# Altium PCB f401ccu6_w25q64_20210612.PcbDoc
Units mil, origin at the board's own origin, x right, y up, seen from the top; angles counter-clockwise.
Board outline 1812.39 x 625.7 mil, 2 copper layers (Top Layer, Bottom Layer); 36 components, 43 nets, 155 pads, 77 vias.
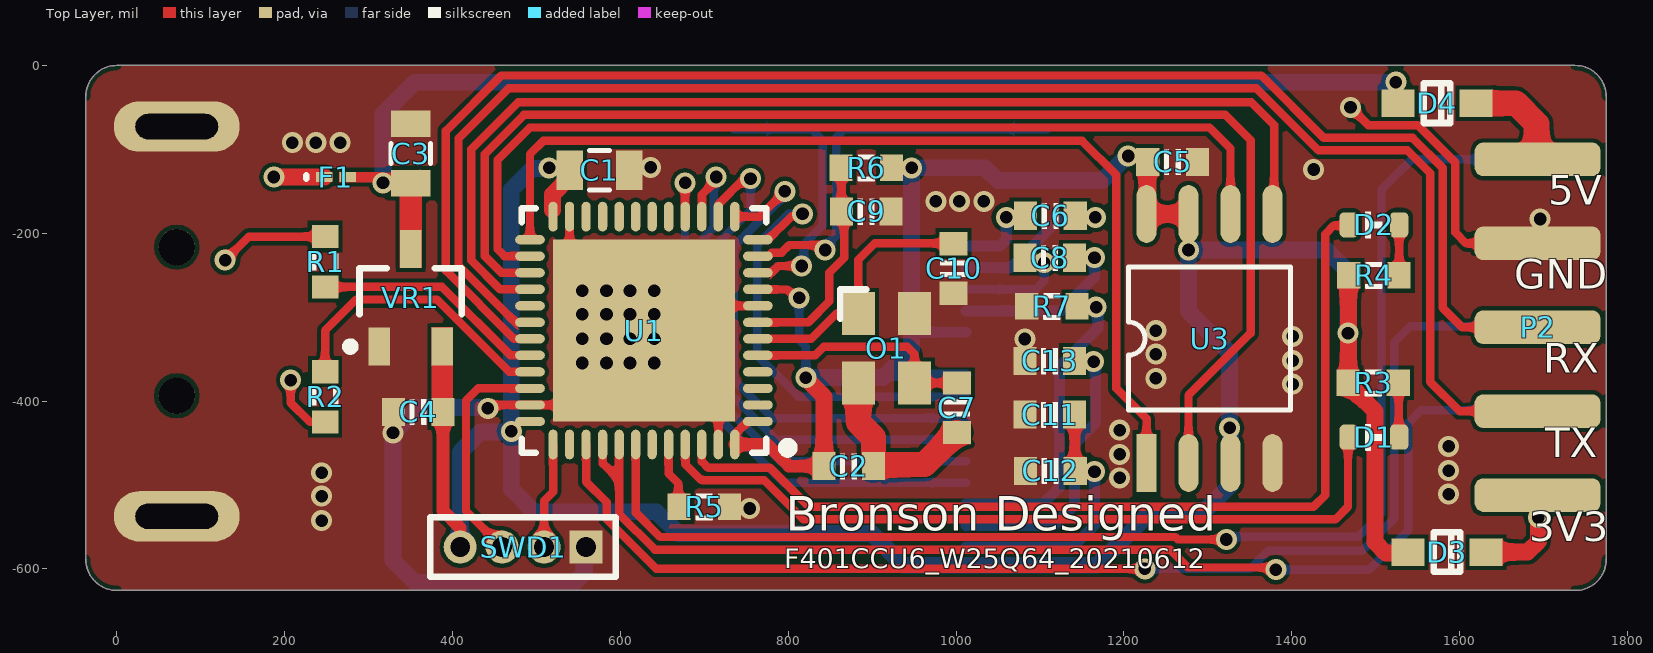
[diagram p0: Top Layer view]
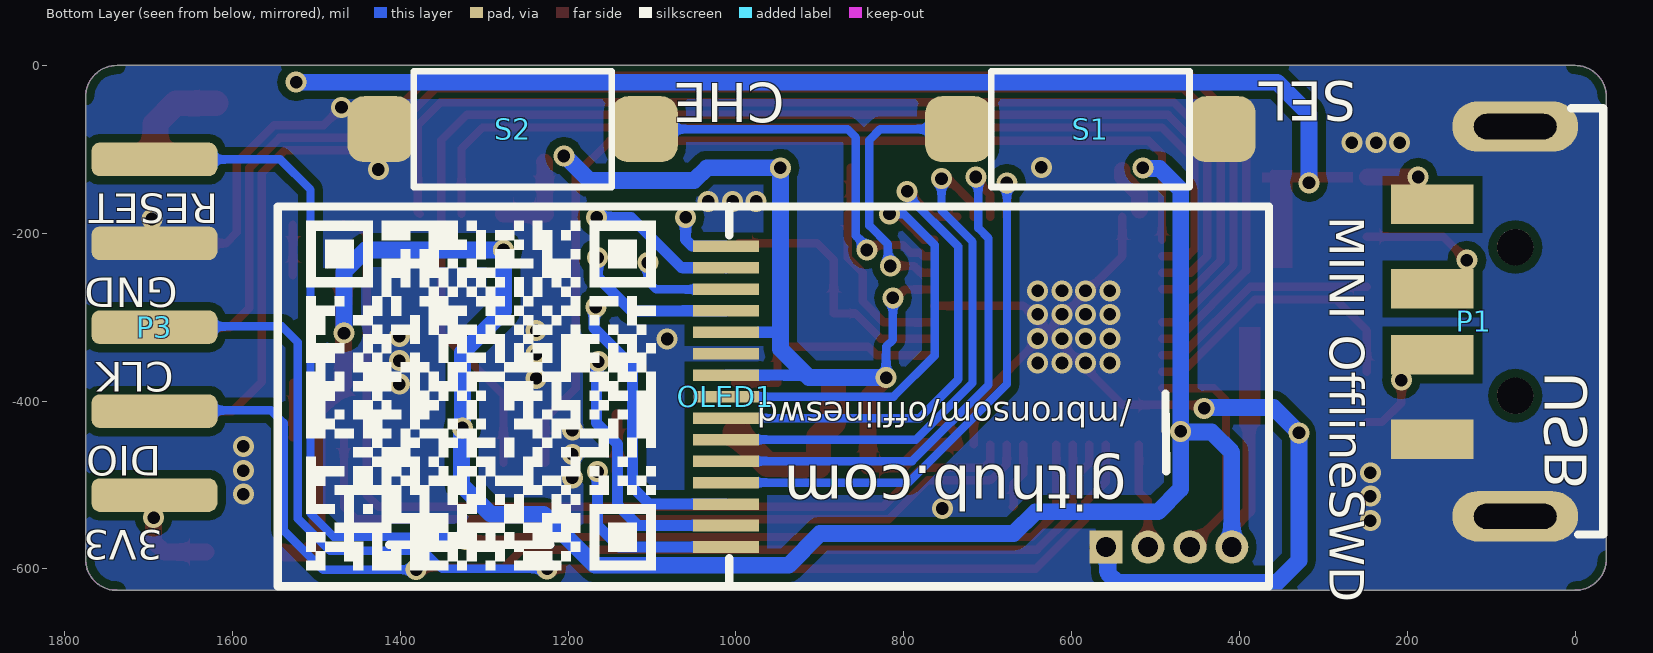
[diagram p1: Bottom Layer view, seen from below]
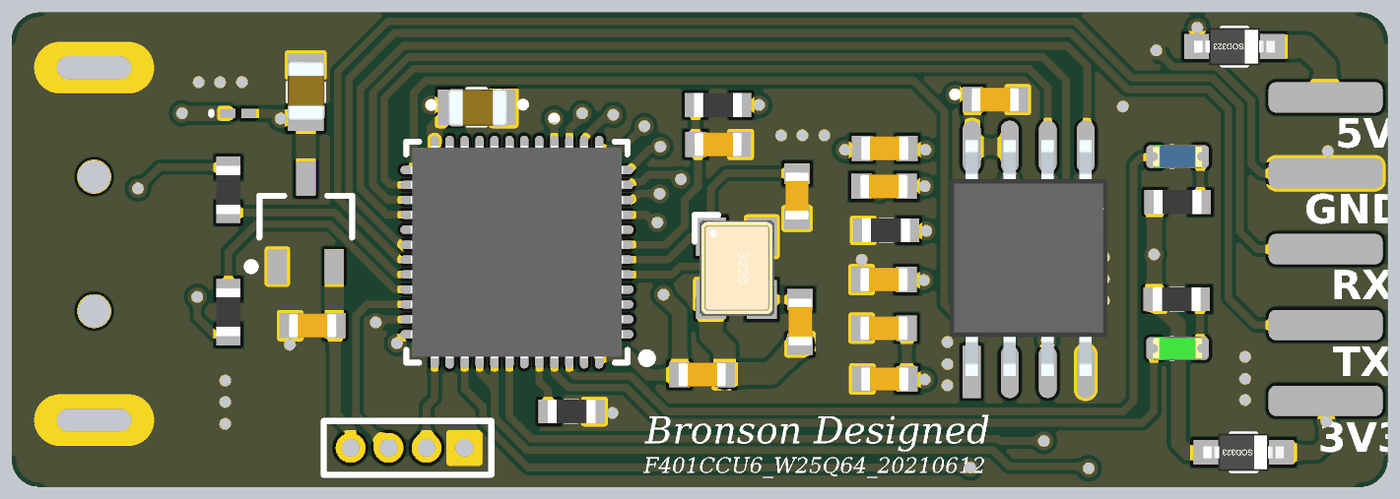
[diagram p2: 3D render of the assembled board from above, using the file's embedded part models]
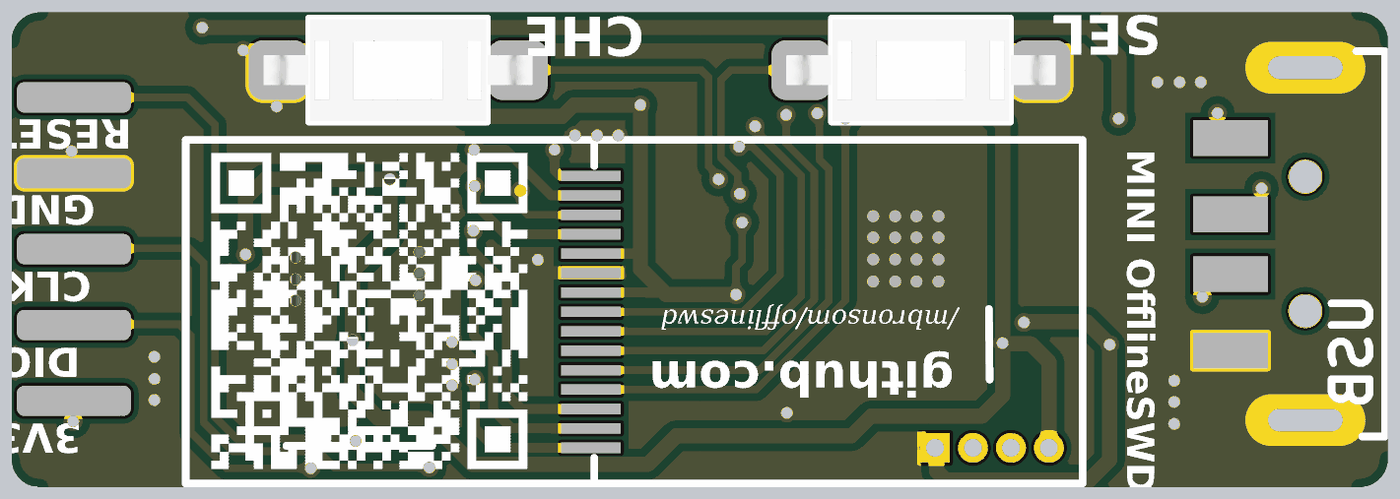
[diagram p3: 3D render of the assembled board from below, using the file's embedded part models]

## Layer stack, top to bottom
Top Solder: solder mask 0.4, Solder Resist, Dk 3.5
Top Layer: signal copper 1.4
Dielectric 1: dielectric 12.6, FR-4, Dk 4.8
Bottom Layer: signal copper 1.4
Bottom Solder: solder mask 0.4, Solder Resist, Dk 3.5

## Board outline
-37.39,-588.7 -37.39,-37.39 -37.39,-36.99 cw(c0,-37.39) 0.34,0 0,0 1737.39,0 1737.39,-0.04 cw(c1737.75,-37.29) 1775,-36.87 1775,-37.29 1775,-588.71 1774.92,-588.71 cw(c1737.86,-588.64) 1737.19,-625.7 0.32,-625.7 cw(c0.01,-588.3)

## Design rules (kind name [scope] priority, off if disabled: settings)
Clearance Clearance_1 [InNamedPolygon('Bottom Layer-GND')] p1: gap=10 ignorepadtopadclearanceinfootprint=FALSE except(0: Arc-Hole Track-Hole SMDPad-Hole THPad-Hole Via-Hole Fill-Hole Poly-Hole Region-Hole Text-Hole)
Clearance [All] p2: gap=5 ignorepadtopadclearanceinfootprint=FALSE
ComponentClearance [All] p1 off: gap=10 collisioncheckmode=3 verticalgap=100000 showdistances=FALSE
MinimumSolderMaskSliver [All] p1 off: minsoldermaskwidth=5
PlaneConnect [All] p1: planeconnectstyle=Direct reliefexpansion=20 reliefentries=4 reliefconductorwidth=10 reliefairgap=10
PolygonConnect [All] p1: connectstyle=Direct reliefconductorwidth=10 reliefentries=4 polygonreliefangle="90 Angle" airgapwidth=10
RoutingVias [All] p1: holewidth=28 width=50 viastyle="Through Hole" minholewidth=28 minwidth=50 maxholewidth=28 maxwidth=50
SilkToSilkClearance [All] p1 off: silktosilkclearance=10
SilkToSolderMaskClearance [IsPad] p1 off: minsilkscreentomaskgap=10 clearancetoexposedcopper=TRUE
SolderMaskExpansion [All] p1: expansion=4
Width [All] p1: maxlimit=30 minlimit=5 preferedwidth=10
25 further rules are at their usual default settings.

## Components (designator, comment, footprint, x,y, rotation, side; value= is the part's Value field where it differs from the comment)
C1 "100nF (104) 10% 50V" 0805L 575,-125 r180 top
C2 "100nF (104) 10% 50V" C0603 872,-479.51 r180 top
C3 "1uF (105) 10% 50V" 0805L 350,-105 r270 top
C4 "1uF (105) 10% 50V" C0603 359,-410.88 r0 top
C5 "100nF (104) 10% 50V" C0603 1258,-113 r0 top
C6 "1uF (105) 10% 50V" C0603 1112.46,-181.21 r180 top
C7 "9pF" C0603 1003,-408 r270 top
C8 "1uF (105) 10% 50V" C0603 1111.46,-231.21 r180 top
C9 "100nF (104) 10% 50V" C0603 893,-176 r180 top
C10 "9pF" C0603 999,-242 r270 top
C11 "4.7uF (475) 10% 16V" C0603 1111.46,-414.21 r0 top
C12 "100nF (104) 10% 50V" C0603 1112.46,-481.21 r0 top
C13 "2.2uF (225) 10% 16V" C0603 1111.46,-350.21 r0 top
D1 "绿灯 0603" LED_0603_GREEN 1498,-443 r0 top
D2 "蓝灯 0603" LED_0603_BLUE 1498,-190 r0 top
D3 "1N4148WS T4" SOD-323 1585,-580 r180 top
D4 "1N4148WS T4" SOD-323 1573,-45 r180 top
F1 "500mA" 0603 261,-133 r0 top
O1 "16MHZ" "OSC 3225-4P" 917,-337 r270 top
OLED1 "QG-2832TLBFG02" 0.91-OLED 365.43,-671.74 r0 bottom
P1 "USB" USB_A/P_B 71.27,-305.64 r90 bottom
P2 "Header 5" PinHeader_5 1695,-308 r180 top
P3 "Header 5" PinHeader_5 1695,-316 r180 bottom
R1 "22Ω (22R0) ±1%" RES0603 248,-234 r90 top
R2 "22Ω (22R0) ±1%" RES0603 248,-395 r270 top
R3 "1KΩ (1001) ±1%" RES0603 1497,-378 r180 top
R4 "1KΩ (1001) ±1%" RES0603 1498,-250 r180 top
R5 "10KΩ (1002) ±1%" RES0603 700,-526 r180 top
R6 "10KΩ (1002) ±1%" RES0603 893,-122 r0 top
R7 "2MΩ (2004) ±1%" RES0603 1114.15,-287.21 r0 top
S1 "KEY" KEY 577.52,-76 r0 bottom
S2 "KEY" KEY 1266,-76 r180 bottom
SWD1 "MHDR1X4" MHDR1X4 559,-574 r180 top
U1 "STM32F401CCU6" UFQFPN-48_L7.0-W7.0-P0.50-BL-EP 628,-316 r90 top
U3 "W25Q64" SOP8_W 1227,-473.83 r90 top
VR1 "XC6206P332MR" SOT-23-3L 350,-277 r270 top

## Footprints (in the part's own frame and the unit in brackets; to place one, negate y for a bottom-side part, rotate by r counter-clockwise, add the part's x,y. Pads: shape width x height; smd on the part's side, far side on the other; paste and mask are expansions set on the pad)
0.91-OLED [mm]
  rect 2x0.35 smd: 1(16.423,-11.585) 2(16.423,-10.933) 3(16.423,-10.283) 4(16.423,-9.633) 5(16.423,-8.985) 6(16.423,-8.335) 7(16.423,-7.685) 8(16.423,-7.035) 9(16.423,-6.385) 10(16.423,-5.735) 11(16.423,-5.085) 12(16.423,-4.435) 13(16.423,-3.785) 14(16.423,-3.135) 15(16.423,-2.485)
  silkscreen extent -0.02,-12.79 29.98,-1.29
0603 [mm] "Chip Inductor, Body 0.6x0.3mm, IPC High Density"
  rect 0.5x0.3 smd: 1(-0.35,0) 2(0.35,0)
  silkscreen extent -0.9,-0.05 -0.9,0.05, body extent -0.33,-0.18 0.33,0.18, height 0.55
0805L [mm]
  rect 0.8x1.2 smd: 1(-0.9,0) 2(0.9,0)
  silkscreen extent -0.3,-0.6 0.3,0.6, body extent -1.04,-0.61 0.97,0.64, height 1.4
C0603 [mm]
  rect 0.7x0.85 smd: 1(-0.75,-0.051) 2(0.75,-0.051)
  silkscreen extent -0.24,-0.43 0.24,0.33, body extent -0.8,-0.45 0.8,0.35, height 0.8
KEY [mm]
  rrect50% 2x2 smd: 1(-4,0) 2(4,0)
  silkscreen extent -3,-1.75 3,1.75, body extent -4.5,-1.75 4.5,1.75, height 4.5
LED_0603_BLUE [mil]
  rrect50% 22x30 smd: 1(-30,0) 2(30,0)
  silkscreen extent -10,-16 10,16, body extent -32,-16 32,16, height 24
LED_0603_GREEN [mil]
  rrect50% 22x30 smd: 1(-30,0) 2(30,0)
  silkscreen extent -10,-16 10,16, body extent -32,-16 32,16, height 24
MHDR1X4 [mm] "Connector; Header; 4 Position"
  rect 1x1 hole 0.6: 1(0,0)
  round 1 hole 0.6: 2(1.27,0) 3(2.54,0) 4(3.81,0)
  silkscreen extent -0.9,-0.9 4.71,0.9
"OSC 3225-4P" [mm]
  rect 1.3x1 smd: 1(-1.05,-0.85) 2(1.05,-0.85) 3(1.05,0.85) 4(-1.05,0.85)
  silkscreen extent -1.78,-1.4 -0.89,-0.61, body extent -1.6,-1.23 1.6,1.27, height 0.7
PinHeader_5 [mil]
  rrect50% 150x40 smd: 1(2,204) 2(2,104) 3(2,4) 4(2,-96) 5(2,-196)
RES0603 [mm]
  rect 0.7x0.8 smd: 1(-0.762,0) 2(0.762,0)
  silkscreen extent -0.24,-0.39 0.24,0.39, body extent -0.8,-0.4 0.8,0.4, height 0.45
SOD-323 [mm]
  rect 1x0.83 smd: 1(1.18,0) 2(-1.18,0)
  silkscreen extent -0.4,-0.6 0.4,0.6, body extent -1.35,-0.62 1.35,0.63, height 1.1
SOP8_W [mm]
  rect 1.75x0.6 smd: 1(0,0)
  oval 1.75x0.6 smd: 2(0,-1.27) 3(0,-2.54) 4(0,-3.81) 5(7.536,-3.81) 6(7.536,-2.54) 7(7.536,-1.27) 8(7.536,0)
  silkscreen extent 1.61,-4.36 5.93,0.55, body extent -0.14,-4.54 7.76,0.74, height 2.16
SOT-23-3L [mm]
  rect 1.15x0.65 smd: 1(1.475,-0.95) 2(1.475,0.95) 3(-1.475,0)
  silkscreen extent -0.9,-1.95 1.6,1.55, body extent -0.9,-1.55 0.9,1.55, height 1.25
UFQFPN-48_L7.0-W7.0-P0.50-BL-EP [mm]
  oval 0.28x0.9 smd: 1(-2.751,-3.449) 2(-2.25,-3.449) 3(-1.75,-3.449) 4(-1.25,-3.449) 5(-0.749,-3.449) 6(-0.249,-3.449) 7(0.249,-3.449) 8(0.749,-3.449) 9(1.25,-3.449) 10(1.75,-3.449) 11(2.251,-3.449) 12(2.751,-3.449) 25(2.751,3.449) 26(2.251,3.449) 27(1.75,3.449) 28(1.25,3.449) 29(0.749,3.449) 30(0.249,3.449) 31(-0.249,3.449) 32(-0.749,3.449) 33(-1.25,3.449) 34(-1.75,3.449) 35(-2.25,3.449) 36(-2.751,3.449)
  oval 0.9x0.28 smd: 13(3.449,-2.751) 14(3.449,-2.25) 15(3.449,-1.75) 16(3.449,-1.25) 17(3.449,-0.749) 18(3.449,-0.249) 19(3.449,0.249) 20(3.449,0.749) 21(3.449,1.25) 22(3.449,1.75) 23(3.449,2.25) 24(3.449,2.751) 37(-3.449,2.751) 38(-3.449,2.25) 39(-3.449,1.75) 40(-3.449,1.25) 41(-3.449,0.749) 42(-3.449,0.249) 43(-3.449,-0.249) 44(-3.449,-0.749) 45(-3.449,-1.25) 46(-3.449,-1.75) 47(-3.449,-2.25) 48(-3.449,-2.751)
  rect 5.5x5.5 smd: 49(0,0)
  silkscreen extent -3.7,-4.5 3.7,3.7, body extent -4.32,-3.55 3.55,4.06, height 0.7
USB_A/P_B [mm] "A型USB 插头，20*13*4.5mm"
  round 1.1 hole 1.1: 0(-2.237,0) 0(2.263,0)
  rect 1.2x2.5 smd: 1(3.556,2.508) 2(1,2.508) 3(-1,2.508) 4(-3.556,2.508)
  oval 1.524x3.81 hole 0.762 slot 2.5 at 90 deg: 4(-5.887,0) 4(5.913,0)
  silkscreen extent -6.44,-2.67 6.46,-1.7, body extent -6.46,-17.9 6.49,2.7, height 3.25

## Part data
C1 C2 C5 C9 C12: library part "0603 100nF (104) 10%", "贴片电容", Package=0603, SuppliersPartNumber=C14663, ComponentLink1Description=供应商链接, ComponentLink1URL=http://www.szlcsc.com/product/details_15331.html, Supplier=LC
C3 C4 C6 C8: library part "0603 1uF (105) 10%", "贴片电容", Package=0603, SuppliersPartNumber=C15849, ComponentLink1Description=供应商链接, ComponentLink1URL=http://www.szlcsc.com/product/details_16531.html, Supplier=LC
C7 C10: library part "0603 22pF (220) 5%", "贴片电容", Package=0603, SuppliersPartNumber=C1653, ComponentLink1Description=供应商链接, ComponentLink1URL=http://www.szlcsc.com/product/details_2005.html, Supplier=LC
C11: library part "0603 4.7uF (475) 10%", "贴片电容", Package=0603, SuppliersPartNumber=C19666, ComponentLink1Description=供应商链接, ComponentLink1URL=http://www.szlcsc.com/product/details_20375.html, Supplier=LC
C13: library part "0603 2.2uF (225) 10%", "贴片电容", Package=0603, SuppliersPartNumber=C23630, ComponentLink1Description=供应商链接, ComponentLink1URL=http://www.szlcsc.com/product/details_24366.html, Supplier=LC
D1: library part "0603 绿灯", "发光二极管", Package=0603, SuppliersPartNumber=C72043, ComponentLink1Description=供应商链接, ComponentLink1URL=http://www.szlcsc.com/product/details_73152.html, Supplier=LC
D2: library part "0603 蓝灯", "发光二极管", Package=0603, SuppliersPartNumber=C72041, ComponentLink1Description=供应商链接, ComponentLink1URL=http://www.szlcsc.com/product/details_73150.html, Supplier=LC
D3 D4: library part "SOD-323 1N4148WS T4", "二极管", Package=SOD-323, SuppliersPartNumber=C2128, ComponentLink1Description=供应商链接, ComponentLink1URL=http://www.szlcsc.com/product/details_2485.html, Supplier=LC
F1: library part FUSE, "保险丝，熔断丝"
O1: library part OSC, "OSC"
OLED1: library part 0.91-OLED, BOM_Manufacturer=Allvision, BOM_Manufacturer Part=QG-2832TLBFG02, BOM_Supplier=LCSC, BOM_Supplier Part=C91220, Contributor=LCSC, spicePre=O, spiceSymbolName=QG-2832TLBFG02
P1: library part 1470695-2, "USB 1.1, Right Angle, SMT, A Type, Plug, 4 Position, Natural", PackageDocument=21-Jan-2003, ComponentLink1Description="Manufacturer Link", ComponentLink1URL=http://www.tycoelectronics.com/, ComponentLink2Description="Packaging Specification", ComponentLink2URL=http://ecommas.tycoelectronics.com/commerce/DocumentDelivery/DDEController?Action=showdoc&DocId=Customer+Drawing%7F1470695%7FO%7Fpdf%7FEnglish%7FC_1470695_O.pdf, ContactMaterial=Brass, ContactPlating="Gold (30) over Nickel (50)", DatasheetDocument=21-Jan-2003, DrillSize="Corresponds to nominal value.", HousingMaterial=Thermoplastic, PackageReference=1470695A, PanelGround=Without, PCB_Layout="Complies with manufacturer's recommendation.", Published=15-Jul-2004, Publisher="Altium Limited"
P2 P3: "Header, 5-Pin", LatestRevisionDate=17-Jul-2002, LatestRevisionNote="Re-released for DXP Platform.", Publisher="Altium Limited"
R1 R2: library part "0603 22Ω (22", "贴片电阻", Package=0603, SuppliersPartNumber=C23345, ComponentLink1Description=供应商链接, ComponentLink1URL=http://www.szlcsc.com/product/details_24078.html, Supplier=LC
R3 R4: library part "0603 1KΩ (10", "贴片电阻", Package=0603, SuppliersPartNumber=C21190, ComponentLink1Description=供应商链接, ComponentLink1URL=http://www.szlcsc.com/product/details_21904.html, Supplier=LC
R5 R6: library part "0603 10KΩ (10", "贴片电阻", Package=0603, SuppliersPartNumber=C25804, ComponentLink1Description=供应商链接, ComponentLink1URL=http://www.szlcsc.com/product/details_26547.html, Supplier=LC
R7: library part "0603 2MΩ (20", "贴片电阻", Package=0603, SuppliersPartNumber=C22976, ComponentLink1Description=供应商链接, ComponentLink1URL=http://www.szlcsc.com/product/details_23703.html, Supplier=LC
SWD1: "Header, 4-Pin", LatestRevisionDate=17-Jul-2002, LatestRevisionNote="Re-released for DXP Platform.", Publisher="Altium Limited"
U3: library part W25Q, "W25Q"
VR1: library part "SOT-23 XC620", "低压差线性稳压(LDO)", Package=SOT-23, SuppliersPartNumber=C5446, ComponentLink1Description=供应商链接, ComponentLink1URL=http://www.szlcsc.com/product/details_5896.html, Supplier=LC

## Via types
v1: diameter 25, hole 15, Top Layer to Bottom Layer, tented both sides, 77 vias

## Nets (pads, with @x,y where several pads share a name; then routed paths per layer and width w, separated by ;. In a path a pad name is that pad's centre, name@x,y a point inside that pad or via, vN(x,y) a via of type N, cw(c..) or ccw(c..) an arc to the next point about the centre after c; other vN are vias at no path point)
3V3: C1.2 C2.2 C4.2 C5.1 D3.1 OLED1.5 OLED1.7 R3.2 R4.2 R6.2 SWD1.4 U1.1 U1.9 U1.24 U1.36 U1.48 U3.3 U3.7 U3.8 VR1.2 | length 4044.1
  Top Layer w10: U1.48 736.3,-439.59 751.6,-424.29 U1.1 ; U1.9 764,-266.99 798.93,-266.99 808.94,-277 v1(813,-277)
  Top Layer w15: C4.2 388.53,-530.53 409,-551 SWD1.4 ; U1.48 775.03,-451.79 800.75,-477.51 C2.2
  Top Layer w20: U1.24@518.89,-172.48 518.89,-153.56 539.57,-132.87 C1.2 ; v1(821,-372) 821,-373.35 842.47,-394.83 C2.2 ; C5.1 1227.69,-115.78 1227.69,-176.45 U3.8 U3.7 ; R4.2 1467.5,-250.5 1467.5,-377.5 R3.2 1467,-379.97 1499.06,-412.03 1499.06,-568.06 1512,-581 1537.54,-581 D3.1
  Bottom Layer w10: v1(813,-277) 813,-327 821,-335 v1(821,-372)
  Bottom Layer w13: 915.82,-369.18 OLED1.7 ; 947,-318 OLED1.5
  Bottom Layer w20: SWD1.4 409,-461 433.04,-436.96 469.04,-436.96 v1(470,-436) ; v1(515,-122) 514.04,-122.96 495.04,-122.96 470,-148 v1(470,-436) ; v1(821,-372) 913,-372 915.82,-369.18 947,-338 947,-318 v1(947,-122) 1034.68,-122 1049.68,-137 1174.65,-137 1203.65,-108 v1(1205,-108) ; v1(1467,-319) 1467,-245.37 1441.63,-220 v1(1277,-220) 1277,-293 1326,-342 v1(1326,-432) 1326.96,-432.96 1326.96,-500.04 1292,-535 1228.91,-535 1168.11,-595.8 937.46,-595.8 899.66,-558 669,-558 643,-532 497,-532 470,-505 v1(470,-436)
5V: C3.2 D4.1 F1.2 VR1.3 | length 1304.7
  Bottom Layer w20: v1(317,-140) 317,-58 355,-20 v1(1524,-20)
GND: C1.1 C2.1 C3.1 C4.1 C5.2 C7.2 C9.1 C10.2 C11.1 C12.1 C13.1 O1.2 O1.4 OLED1.6 P1.4 P2.4 P3.2 R5.1 R7.1 S1.1 S2.1 SWD1.1 U1.8 U1.23 U1.35 U1.47 U1.49 U3.4 VR1.1 | length 1831.8
  Top Layer w10: v1(442,-408.7) 446.06,-408.7 450.16,-404.59 U1.35 539.4,-404.59 U1.49 ; U1.23 539.4,-227.39 U1.49 ; U1.47 716.6,-404.59 U1.49 ; U1.8 657.5,-286.49 U1.49 ; v1(1470,-50) 1491.34,-71.34 1550.35,-71.34 1595,-115.99 1595,-199.15 1607.85,-212 P2.4
  Top Layer w30: O1.2 883.54,-425.6 901.53,-443.6 C2.1@901.53,-477 ; C2.1 C2.1@901.53,-477 ; C7.2 1000.49,-437.53 962.24,-475.78 902.75,-475.78 C2.1@901.53,-477
  Bottom Layer w20: v1(442,-408.7) 441.04,-407.74 359.26,-407.74 v1(329,-438) 329,-590 355.34,-616.34 545.28,-616.34 557,-604.62 557,-576 SWD1.1
  other v1: 244,-542.42 754,-528 244,-513.42 1587,-511 1195,-491.6 244,-485.42 1587,-483 1195,-463.6 1587,-454 1195,-434.6 1401,-379.85 1238,-373 554.42,-354.67 583.42,-354.67 611.42,-354.67 640.42,-354.67 1401,-351.85 1238,-344 554.42,-325.67 583.42,-325.67 611.42,-325.67 640.42,-325.67 1082.04,-326.04 1401,-322.85 1238,-316 554.42,-296.67 583.42,-296.67 611.42,-296.67 640.42,-296.67 554.42,-268.67 583.42,-268.67 611.42,-268.67 640.42,-268.67 1696,-183 976,-162.11 1004,-162.11 1033,-162.11 1426,-124 636,-121.6 209,-92 237,-92 266,-92
KEY_CHECK: S2.2 U1.11 | length 483.3
  Top Layer w10: U1.11 776.29,-227.39 780.48,-223.21 792.01,-223.21 801.21,-214 838,-214 v1(844,-220)
  Bottom Layer w10: v1(844,-220) 844,-215.94 857,-202.94 857,-86 867,-76 S2.2
KEY_SELECT: S1.2 U1.10 | length 327.4
  Top Layer w10: U1.10 764,-247.29 780,-247.29 788.29,-239 v1(816,-239)
  Bottom Layer w10: S1.2 828,-76 841,-89 841,-191 818.87,-213.13 818.87,-236.13 v1(816,-239)
LED_RUNNING: D2.1 U1.46 | length 1135
  Top Layer w10: U1.46 697.1,-451.99 697.1,-472.14 704.46,-479.51 778,-479.51 824.49,-526 1426,-526 1440,-512 1440,-201 1450,-191 1467,-191 D2.1
LED_STATE: D1.1 U1.45 | length 930.1
  Top Layer w10: U1.45 677.4,-451.99 677.4,-475.4 696,-494 697.74,-494 698.25,-494.51 771.51,-494.51 818,-541 1452,-541 1467,-526 1467,-444 D1.1
NetC6_1: C6.1 OLED1.2 | length 179
  Bottom Layer w13: OLED1.2 1012.39,-240.92 1065.14,-240.92 1125.06,-181 v1(1166,-181)
NetC6_2: C6.2 OLED1.1 | length 78
  Bottom Layer w13: OLED1.1 1012.39,-215.25 1052.38,-215.25 1060,-207.63 v1(1060,-181)
NetC7_1: C7.1 O1.3 U1.5 | length 279.6
  Top Layer w10: U1.5 831.93,-345.49 842.36,-335.07 941.58,-335.07 950.46,-343.96 O1.3 950.6,-378.47 C7.1
NetC8_1: C8.1 OLED1.4 | length 192.8
  Bottom Layer w13: OLED1.4 1124.51,-292.49 1165,-252 v1(1165,-229)
NetC8_2: C8.2 OLED1.3 | length 119.1
  Bottom Layer w10: OLED1.3 1095.1,-266.9 1105,-257 v1(1105,-235)
NetC9_2: C9.2 R6.1 U1.7 | length 263.5
  Top Layer w10: U1.7 823.81,-306.19 849,-281 849,-246.82 866.5,-229.32 866.5,-177.03 C9.2 ; R6.1 863.24,-122.24 C9.2@863.24,-174.24
NetC10_1: C10.1 O1.1 U1.6 | length 318.1
  Top Layer w10: U1.6 827.21,-325.79 857.34,-295.66 O1.1 883.54,-231.46 903,-212 996.53,-212 C10.1
NetC11_2: C11.2 C12.2 OLED1.15 | length 295.1
  Top Layer w13: C11.2 1141.48,-416.71 1141.48,-482.71 C12.2
  Bottom Layer w13: OLED1.15 1139.09,-573.91 1165,-548 v1(1165,-484)
NetC13_2: C13.2 OLED1.14 | length 321.3
  Bottom Layer w13: OLED1.14 1116.68,-548.32 1141,-524 1141,-451 1166,-426 1166,-355 v1(1164,-353)
NetD1_2: D1.2 R3.1 | length 65.4
  Top Layer w10: R3.1 1527.5,-378.5 1527.5,-442.5 D1.2
NetD2_2: D2.2 R4.1 | length 60
  Top Layer w10: R4.1 D2.2
NetD4_2: D4.2 P2.5 | length 125.3
  Top Layer w30: D4.2 1667,-45 1692,-70 1692,-111 P2.5
NetF1_1: F1.1 P1.1 | length 60.2
  Top Layer w20: v1(187,-133) F1.1
NetOLED1_13: OLED1.13 R7.2 | length 354.1
  Bottom Layer w13: OLED1.13 1103.27,-522.73 1123,-503 1123,-359 1169,-313 1169,-290 v1(1167,-288)
NetP1_2: P1.2 R1.2 | length 130.7
  Top Layer w10: v1(129,-232.15) 157.15,-204 R1.2
NetP1_3: P1.3 R2.2 | length 77.5
  Top Layer w10: v1(207,-375) 207,-402 230,-425 R2.2
NetR5_2: R5.2 U1.44 | length 79.4
  Top Layer w10: U1.44 657.5,-486.5 669,-498 669,-525 R5.2
NetSWD1_2: SWD1.2 U1.37 | length 126.6
  Top Layer w10: SWD1.2 509,-519 519.7,-508.3 U1.37
NetSWD1_3: SWD1.3 U1.34 | length 274.7
  Top Layer w10: SWD1.3 416,-531 416,-399.31 430.41,-384.89 U1.34
OLED_CS: OLED1.8 U1.12 | length 536.3
  Top Layer w10: U1.12 776.01,-207.69 803.83,-179.87 814.13,-179.87 v1(817,-177)
  Bottom Layer w10: v1(817,-177) 800,-177 763,-214 763,-345.82 811.95,-394.77 OLED1.8
OLED_DC: OLED1.10 U1.14 | length 646.3
  Top Layer w10: U1.14 716.6,-165.75 747.35,-135 v1(755,-135)
  Bottom Layer w10: v1(755,-135) 755,-173 718,-210 718,-378.43 785.52,-445.95 OLED1.10
OLED_RES: OLED1.9 U1.13 | length 617.8
  Top Layer w10: U1.13 765.81,-180.19 v1(796,-150)
  Bottom Layer w10: v1(796,-150) 796,-154.79 735,-215.79 735,-374.21 781.15,-420.36 OLED1.9
SAFE_3V3: D3.2 P2.1 P3.5 | length 96
  Top Layer w20: D3.2 1681.14,-580 1694,-567.14 v1(1694,-539)
SPI1_MISO: OLED1.12 U1.16 | length 663.7
  Top Layer w10: v1(677,-140) 677.1,-140.1 677.1,-180.09 U1.16
  Bottom Layer w10: v1(677,-140) 677,-379.85 794.29,-497.14 OLED1.12
SPI1_SCK: OLED1.11 U1.15 | length 658.8
  Top Layer w10: U1.15 697.1,-180 697.1,-153.96 714,-137.06 v1(714,-133)
  Bottom Layer w10: v1(714,-133) 711.13,-135.87 711.13,-193.87 699,-206 699,-380.64 789.91,-471.55 OLED1.11
SPI2_CS: U1.25 U3.1 | length 1182.1
  Top Layer w10: U1.25 492.21,-105.79 508,-90 1150.22,-90 1191,-130.78 1191,-385 1227,-421 U3.1
SPI2_MISO: U1.27 U3.2 | length 1543.5
  Top Layer w10: U1.27 458.16,-247.09 438.46,-227.39 438.46,-105.54 485,-59 1321,-59 1351,-89 1351,-319 1277,-393 U3.2
SPI2_MOSI: U1.28 U3.5 | length 1315.1
  Top Layer w10: U1.28 456.65,-266.79 422,-232.15 422,-100 478,-44 1352,-44 1379,-71 1379,-175.14 U3.5
SPI2_SCK: U1.26 U3.6 | length 1126.6
  Top Layer w10: U1.26 492.01,-227.2 461.73,-227.2 453.46,-218.93 453.46,-112.54 492,-74 1302,-74 1327,-99 U3.6
SPI3_MISO: P3.4 U1.40 U1.41 | length 1409.2
  Top Layer w10: U1.40 579,-451.99 579,-474.5 598.5,-494 ; U1.41 598.5,-494 ; v1(1381,-601) 1378.4,-598.4 1276.4,-598.4 1255,-577 641,-577 598.5,-534.5 598.5,-494
  Bottom Layer w10: v1(1381,-601) 1492,-601 1539,-554 1539,-426 1554,-411 1692,-411 P3.4
SPI3_SCK: P3.3 U1.39 | length 1476.3
  Top Layer w10: U1.39 559.3,-451.99 559.3,-496.3 583.5,-520.5 583.5,-540.71 642.79,-600 v1(1225,-600)
  Bottom Layer w10: v1(1225,-600) 1350.18,-600 1371.68,-578.5 1483.71,-578.5 1522,-540.21 1522,-330 1541,-311 1692,-311 P3.3
SWD_RESET: P3.1 U1.42 | length 1583
  Top Layer w10: U1.42 618.2,-532.99 647.21,-562 1261.21,-562 1264.21,-565 v1(1322,-565)
  Bottom Layer w10: v1(1322,-565) 1325.5,-561.5 1479.5,-561.5 1507,-534 1507,-148 1543,-112 P3.1
USART1_RX: P2.3 U1.31 | length 1850.7
  Top Layer w10: U1.31 473.22,-325.79 392,-244.57 392,-78 458,-12 1363.83,-12 1438.17,-86.34 1544.13,-86.34 1580,-122.21 1580,-289 1603,-312 P2.3
USART1_TX: P2.2 U1.30 | length 1880.6
  Top Layer w10: U1.30 474.83,-306.19 407,-238.36 407,-87 467,-27 1357.62,-27 1431.96,-101.34 1537.92,-101.34 1565,-128.42 1565,-377 1600,-412 P2.2
USB_OTG_DM: R1.1 U1.32 | length 278
  Top Layer w10: R1.1 387.36,-264 468.65,-345.3 492.01,-345.3 U1.32
USB_OTG_DP: R2.1 U1.33 | length 344.2
  Top Layer w10: R2.1 248,-316 285,-279 381.14,-279 467.14,-365 492.01,-365 U1.33
pads on no net: P1.0 U1.2 U1.3 U1.4 U1.17 U1.18 U1.19 U1.20 U1.21 U1.22 U1.29 U1.38 U1.43

## Polygon pours and split planes (outlines as drawn)
GND on Bottom Layer "Bottom Layer-GND" (solid, pour order 11): -37.39,-588.7 -37.39,-37.39 -37.39,-36.99 cw(c0,-37.39) 0.34,0 0,0 1737.39,0 1737.39,-0.04 cw(c1737.75,-37.29) 1775,-36.87 1775,-37.29 1775,-588.71 1774.92,-588.71 cw(c1737.86,-588.64) 1737.19,-625.7 0.32,-625.7 cw(c0.01,-588.3)
GND on Top Layer "Top Layer-GND" (solid, pour order 12): -37.39,-588.7 -37.39,-37.39 -37.39,-36.99 cw(c0,-37.39) 0.34,0 0,0 1737.39,0 1737.39,-0.04 cw(c1737.75,-37.29) 1775,-36.87 1775,-37.29 1775,-588.71 1774.92,-588.71 cw(c1737.86,-588.64) 1737.19,-625.7 0.32,-625.7 cw(c0.01,-588.3)

## Keep-outs
Keep-Out Layer:
  lines w1: -37.39,-588.7 ccw(c0.01,-588.3) 0.32,-625.7 ; -37.39,-36.99 cw(c0,-37.39) 0.34,0 ; 1737.19,-625.7 ccw(c1737.86,-588.64) 1774.92,-588.71 ; 1737.39,-0.04 cw(c1737.75,-37.29) 1775,-36.87

## Other copper
Top Layer:
  region net 3V3: 375,-312 375,-429 400,-429 400,-427 400,-312
  region net 5V: 265,-127 265,-139 373,-139 373,-128
  region net 5V: 337,-241 337,-125 360,-125 361,-124 363,-126 363,-241
  region net 3V3: 481,-58.5

## Silkscreen, mask and mechanical layers (free items; w line width, h text height)
Top Overlay:
  text "5V" at 1705.74,-178 h60
  text "GND" at 1665,-278 h60
  text "RX" at 1699.85,-378 h60
  text "TX" at 1702.41,-479 h60
  text "Bronson Designed" at 797,-568 h70
  text "3V3" at 1683.26,-579 h60
  text "F401CCU6_W25Q64_20210612" at 795,-607 h40
Bottom Overlay:
  drawing of 13445 lines, arcs and shapes, not listed
  text "SEL" at 261,-4 h80 r180
  text "CHE" at 942,-6 h80 r180
  text "RESET" at 1617,-141 h60 r180
  text "MINI OfflineSWD" at 306,-180 h70 r90
  text "GND" at 1665.01,-241 h60 r180
  text "CLK" at 1670.11,-342 h60 r180
  text "/mbronsom/offlineswd" at 529,-392 h50 r180
  text "DIO" at 1684.77,-442 h60 r180
  text "github.com" at 534,-460 h90 r180
  text "3V3" at 1683.27,-542 h60 r180
Mechanical 1:
  lines w1: -37.39,-588.7 ccw(c0.01,-588.3) 0.32,-625.7 1737.19,-625.7 ccw(c1737.86,-588.64) 1774.92,-588.71 1775,-588.71 1775,-37.29 1775,-36.87 ccw(c1737.75,-37.29) 1737.39,-0.04 1737.39,0 0,0 0.34,0 ccw(c0,-37.39) -37.39,-36.99 -37.39,-37.39 -37.39,-588.7